# EAGLE board v2 (EAGLE 6.1)

Size 44.12 x 69.84 mm. Coordinates in mm from the lower left corner, seen from the top.
Outline: 0,0 44.12,0 44.12,69.84 0,69.84 0,0
Copper layers (1*16): Top 0.035mm / dielectric 1.5mm / Bottom 0.035mm
Design rules: minimum track width 10mil, minimum drill 24mil, track to track 8mil, track to pad 8mil, pad to pad 8mil, via to via 8mil, smd to smd 8mil, copper to edge 40mil, drill to drill 8mil, minimum pad ring 10mil, minimum via ring 8mil, stop-mask expansion 4mil, vias tented up to drill 0mil, thermal gap 10mil
Net classes: 1 power: width 0.406 mm
vRestrict: area 15.2,2.5 to 27.9,15.2

## Footprints (pad centres in the part's own frame; a part is rotated, then mirrored left to right if it is on the bottom)
C1206 = smd 1.6 x 1.8: 1 -1.4,0; 2 1.4,0
TINYISP = drill 0.914 octagon: GND 2.54,1.27; MOSI 0,1.27; RESET 2.54,-1.27; SCK 0,-1.27; VCC -2.54,1.27 | drill 0.914: MISO -2.54,-1.27
LED3MM = drill 0.813 octagon: A -1.27,0; K 1.27,0
TQFP32-08 = smd 1.27 x 0.559: 1 -4.293,2.8; 2 -4.293,2; 3 -4.293,1.2; 4 -4.293,0.4; 5 -4.293,-0.4; 6 -4.293,-1.2; 7 -4.293,-2; 8 -4.293,-2.8; 17 4.293,-2.8; 18 4.293,-2; 19 4.293,-1.2; 20 4.293,-0.4; 21 4.293,0.4; 22 4.293,1.2; 23 4.293,2; 24 4.293,2.8 | smd 0.559 x 1.27: 9 -2.8,-4.293; 10 -2,-4.293; 11 -1.2,-4.293; 12 -0.4,-4.293; 13 0.4,-4.293; 14 1.2,-4.293; 15 2,-4.293; 16 2.8,-4.293; 25 2.8,4.293; 26 2,4.293; 27 1.2,4.293; 28 0.4,4.293; 29 -0.4,4.293; 30 -1.2,4.293; 31 -2,4.293; 32 -2.8,4.293
SCREWTERMINAL-3.5MM-2 = drill 1.2 pad 2.032 square: 1 0,0 | drill 1.2 pad 2.032: 2 3.5,0
M1206 = smd 1.6 x 2: 1 -1.4,0; 2 1.4,0
PNA460XM = drill 1.016 pad 1.93 square: 1 -2.54,0 | drill 1.016 pad 1.93: 2 0,0; 3 2.54,0

## Placement (x,y rotation side)
C1  0.1uF  [C1206]  30.48,5.08 270 top
C2  0.1uF  [C1206]  30.48,11.43 90 top
CON1  [TINYISP]  21.59,66.04 0 bottom
DB0  [LED3MM]  7.62,22.86 0 top
DB1  [LED3MM]  15.24,22.86 0 top
DB2  [LED3MM]  21.59,22.86 0 top
DB3  [LED3MM]  27.94,22.86 0 top
DB4  [LED3MM]  35.56,22.86 0 top
DB5  [LED3MM]  21.59,39.37 0 top
DB6A  [LED3MM]  5.08,12.06 0 top
DB6B  [LED3MM]  38.1,12.06 0 top
DB7A  [LED3MM]  5.08,34.29 0 top
DB7B  [LED3MM]  38.1,34.29 0 top
DC0  [LED3MM]  5.08,55.88 0 top
DC1  [LED3MM]  11.43,61.59 0 top
DC2  [LED3MM]  17.78,55.88 0 top
DC3  [LED3MM]  11.43,50.16 0 top
DC4  [LED3MM]  11.43,55.88 0 top
DC5  [LED3MM]  11.43,20.32 0 top
DD0  [LED3MM]  25.4,55.88 0 top
DD1  [LED3MM]  31.75,61.59 0 top
DD2  [LED3MM]  38.1,55.88 0 top
DD3  [LED3MM]  31.75,50.16 0 top
DD4  [LED3MM]  31.75,55.88 0 top
DD5  [LED3MM]  31.75,20.32 0 top
DD6  [LED3MM]  11.43,25.4 0 top
DD7  [LED3MM]  31.75,25.4 0 top
IC1  MEGA8-AI  [TQFP32-08]  21.59,8.89 0 top
JP1  [SCREWTERMINAL-3.5MM-2]  2.54,66.04 0 top
R1  10k  [M1206]  10.16,5.08 270 top
RB0  1k  [M1206]  7.62,27.94 270 top
RB1  1k  [M1206]  15.24,27.94 270 top
RB2  1k  [M1206]  21.59,27.94 270 top
RB3  1k  [M1206]  27.94,27.94 270 top
RB4  1k  [M1206]  35.56,27.94 270 top
RB5  1k  [M1206]  15.24,39.37 0 top
RB6A  1k  [M1206]  3.81,5.08 90 top
RB6B  1k  [M1206]  40.64,5.08 90 top
RB7A  1k  [M1206]  5.08,39.37 0 top
RB7B  1k  [M1206]  38.1,39.37 0 top
RC0  1k  [M1206]  6.35,50.8 90 top
RC1  1k  [M1206]  6.35,59.69 0 top
RC2  1k  [M1206]  19.05,50.8 90 top
RC3  1k  [M1206]  15.24,45.72 0 top
RC4  1k  [M1206]  16.51,59.69 180 top
RC5  1k  [M1206]  7.62,16.51 90 top
RD0  1k  [M1206]  22.86,50.8 90 top
RD1  1k  [M1206]  26.67,59.69 0 top
RD2  1k  [M1206]  36.83,50.8 90 top
RD3  1k  [M1206]  30.48,44.45 90 top
RD4  1k  [M1206]  26.67,50.8 90 top
RD5  1k  [M1206]  35.56,16.51 90 top
RD6  1k  [M1206]  11.43,30.48 270 top
RD7  1k  [M1206]  31.75,30.48 270 top
U$1  PNA460XM  [PNA460XM]  39.37,67.31 0 top

## Library data of the parts
C1 C2 R1 RB0 RB1-RB5 RB6A RB6B RB7A RB7B RC0 RC1-RC5 RD0 RD1-RD7 = resistor
CON1 = lpatiny; OC_FARNELL: unknown; OC_NEWARK: unknown
DB0 DB1-DB5 DB6A DB6B DB7A DB7B DC0 DC1-DC5 DD0 DD1-DD7 = led
IC1 = atmel; MPN: ATMEGA8-16AU; OC_FARNELL: 9171371; OC_NEWARK: 73M8863
JP1 = SparkFun
U$1 = adafruit

## Nets
+5V [power]: C1.1 C2.1 CON1.VCC IC1.4 IC1.6 IC1.18 JP1.1 R1.2 U$1.3
GND [power]: C2.2 CON1.GND DB0.K DB1.K DB2.K DB3.K DB4.K DB5.K DB6A.K DB6B.K DB7A.K DB7B.K DC0.K DC1.K DC2.K DC3.K DC4.K DC5.K DD0.K DD1.K DD2.K DD3.K DD4.K DD5.K DD6.K DD7.K IC1.3 IC1.5 IC1.21 JP1.2 U$1.2
MISO: CON1.MISO IC1.16 RB4.1
MOSI: CON1.MOSI IC1.15 RB3.1
N$1: IC1.7 RB6A.1 RB6B.2
N$2: IC1.24 RC1.1
N$3: IC1.23 RC0.1
N$4: C1.2 IC1.20
N$5: IC1.26 RC3.1
N$6: IC1.25 RC2.1
N$7: IC1.27 RC4.1
N$8: IC1.28 RC5.1
N$9: IC1.30 RD0.1
N$10: IC1.31 RD1.1
N$11: IC1.1 RD3.1
N$12: IC1.32 RD2.1
N$13: IC1.9 RD5.1
N$14: IC1.2 RD4.1
N$15: IC1.10 RD6.1
N$16: IC1.11 RD7.1
N$17: IC1.12 RB0.1
N$18: IC1.13 RB1.1
N$19: IC1.14 RB2.1
N$21: IC1.8 RB7A.2 RB7B.2
N$23: DB6B.A RB6B.1
N$24: DB7A.A RB7A.1
N$25: DC0.A RC0.2
N$26: DC1.A RC1.2
N$27: DC2.A RC2.2
N$28: DC3.A RC3.2
N$29: DC4.A RC4.2
N$30: DC5.A RC5.2
N$31: DD0.A RD0.2
N$32: DD1.A RD1.2
N$33: DD2.A RD2.2
N$34: DD3.A RD3.2
N$35: DD4.A RD4.2
N$36: DD5.A RD5.2
N$37: DD6.A RD6.2
N$38: DD7.A RD7.2
N$39: DB0.A RB0.2
N$40: DB1.A RB1.2
N$41: DB2.A RB2.2
N$42: DB3.A RB3.2
N$43: DB4.A RB4.2
N$44: DB6A.A RB6A.2
N$45: DB7B.A RB7B.1
N$46: DB5.A RB5.2
N$47: IC1.19 U$1.1
RESET: CON1.RESET IC1.29 R1.1
SCK: CON1.SCK IC1.17 RB5.1

## Tracks (layer width: path | path; a pad name or v marks a point on that pad's centre or on a via)
+5V  (8 unrouted)
GND  (30 unrouted)
MISO  (2 unrouted)
MOSI  (2 unrouted)
N$1  (2 unrouted)
N$2  (1 unrouted)
N$3  (1 unrouted)
N$4  (1 unrouted)
N$5  (1 unrouted)
N$6  (1 unrouted)
N$7  (1 unrouted)
N$8  (1 unrouted)
N$9  (1 unrouted)
N$10  (1 unrouted)
N$11  (1 unrouted)
N$12  (1 unrouted)
N$13  (1 unrouted)
N$14  (1 unrouted)
N$15  (1 unrouted)
N$16  (1 unrouted)
N$17  (1 unrouted)
N$18  (1 unrouted)
N$19  (1 unrouted)
N$21  (2 unrouted)
N$23  (1 unrouted)
N$24  (1 unrouted)
N$25  (1 unrouted)
N$26  (1 unrouted)
N$27  (1 unrouted)
N$28  (1 unrouted)
N$29  (1 unrouted)
N$30  (1 unrouted)
N$31  (1 unrouted)
N$32  (1 unrouted)
N$33  (1 unrouted)
N$34  (1 unrouted)
N$35  (1 unrouted)
N$36  (1 unrouted)
N$37  (1 unrouted)
N$38  (1 unrouted)
N$39  (1 unrouted)
N$40  (1 unrouted)
N$41  (1 unrouted)
N$42  (1 unrouted)
N$43  (1 unrouted)
N$44  (1 unrouted)
N$45  (1 unrouted)
N$46  (1 unrouted)
N$47  (1 unrouted)
RESET  (2 unrouted)
SCK  (2 unrouted)

## Text on the board
tNames: GND | +5V | +5V | GND
tValues: +5V | GND